# Altium PCB USB-C_BENCH_PSU.PcbDoc
Units mm, origin at the board's own origin, x right, y up, seen from the top; angles counter-clockwise.
Board outline 22 x 17 mm, 2 copper layers (Top Layer, Bottom Layer); 27 components, 15 nets, 71 pads, 34 vias.
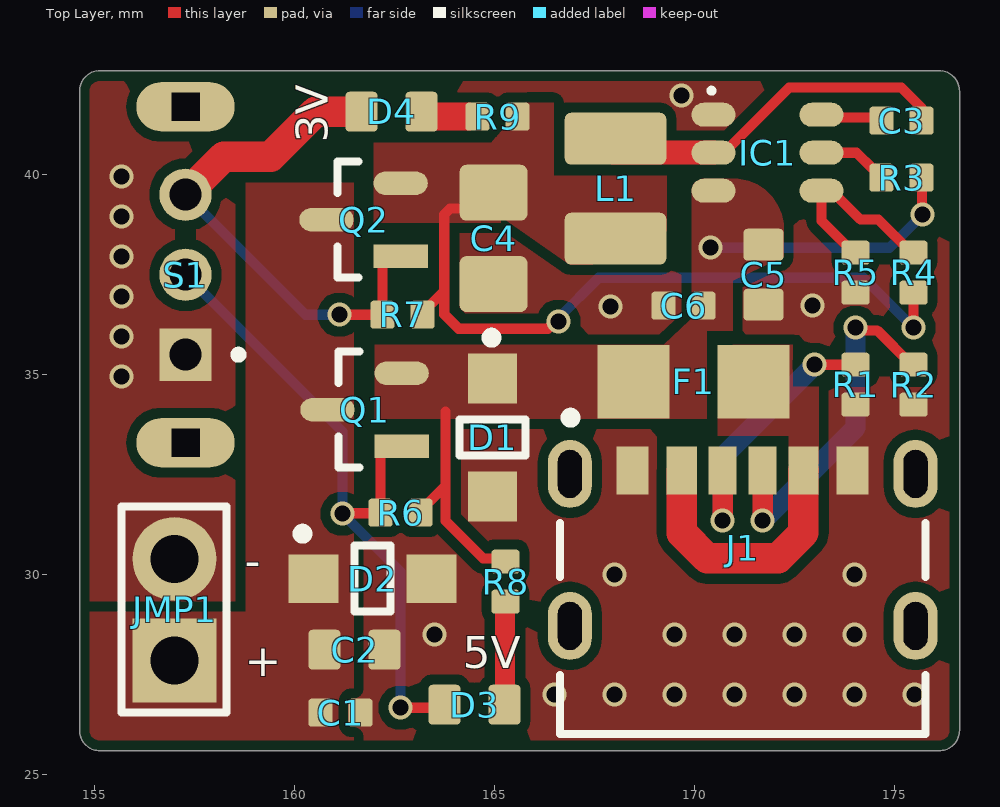
[diagram p0: Top Layer view]
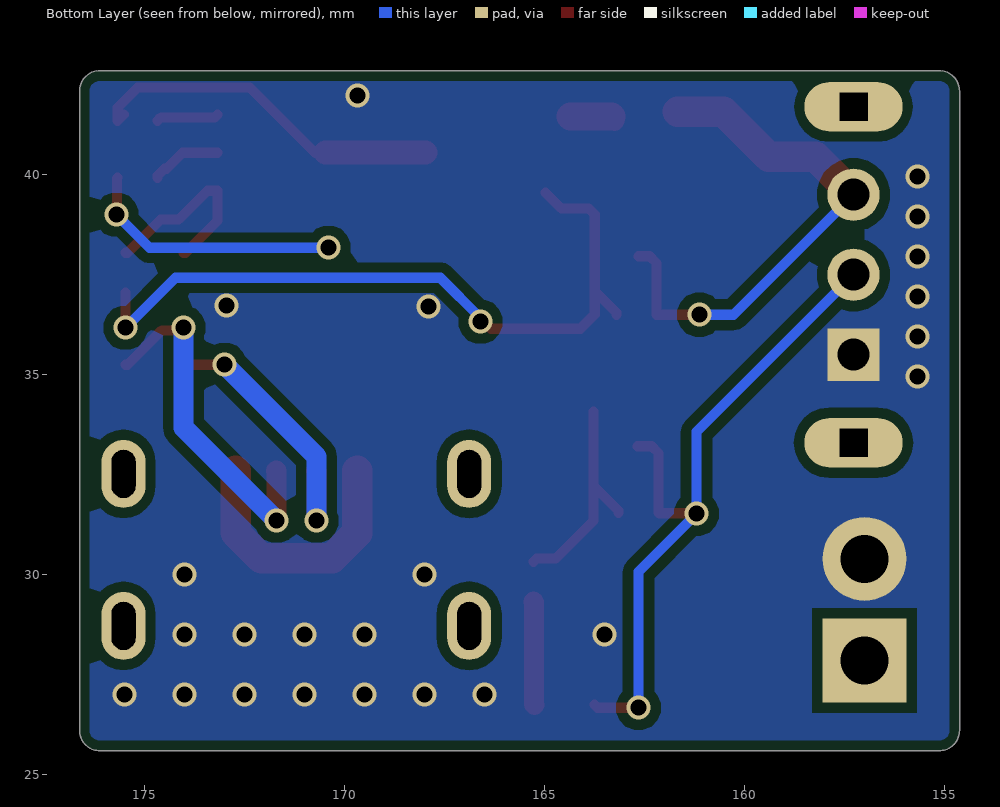
[diagram p1: Bottom Layer view, seen from below]
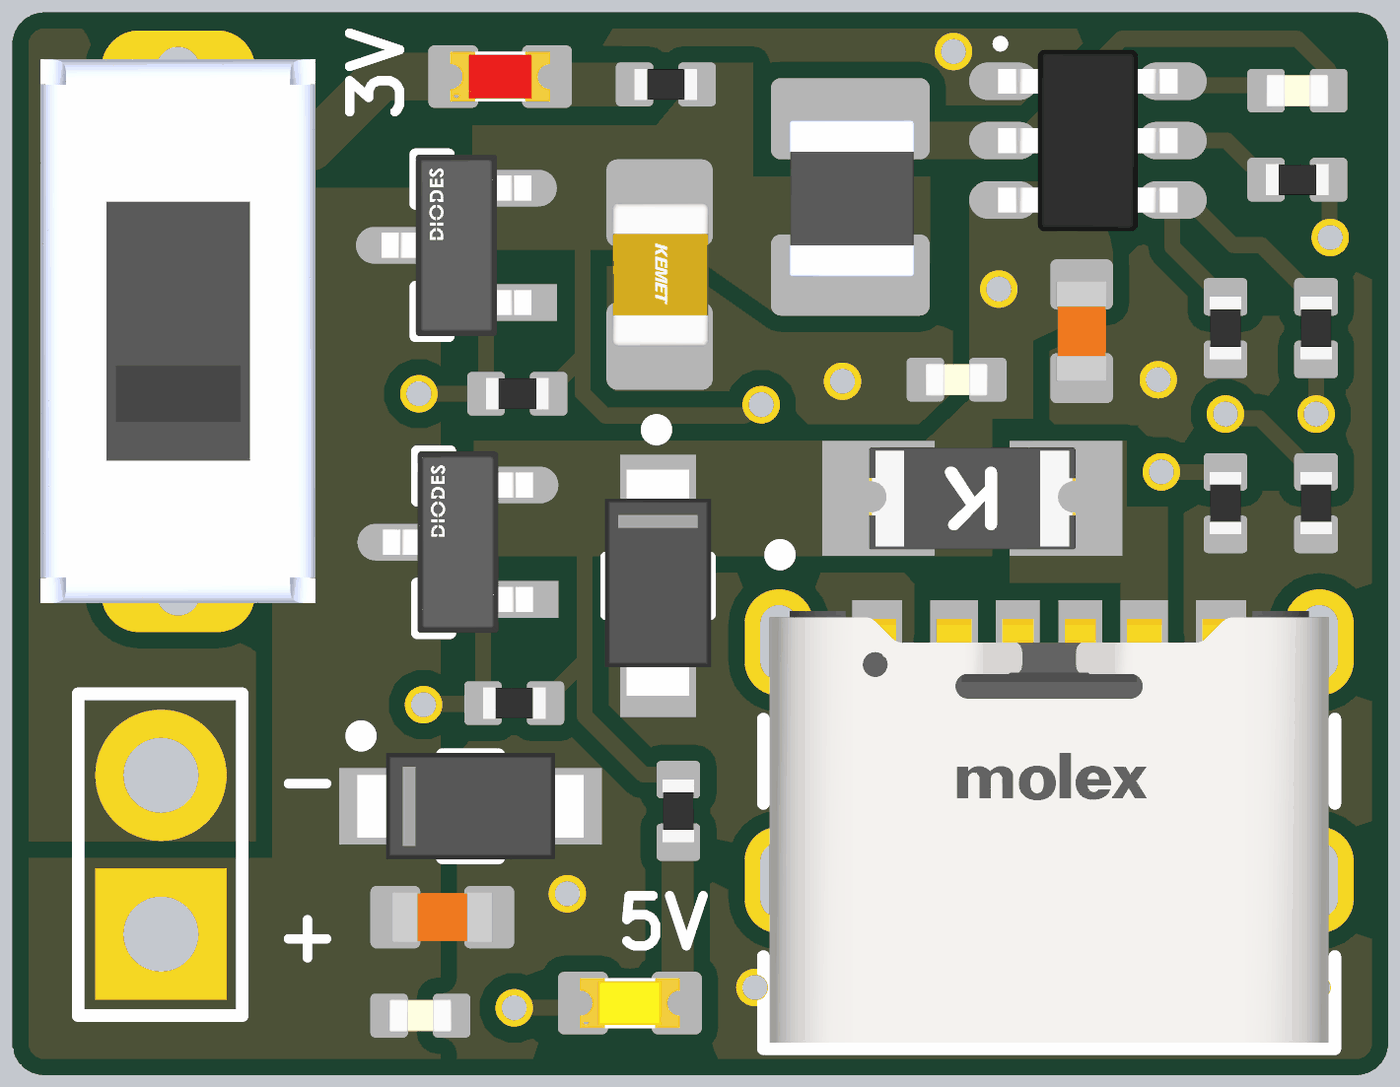
[diagram p2: 3D render of the assembled board from above, using the file's embedded part models]

## Layer stack, top to bottom
Top Solder: solder mask 0.0102, Solder Resist, Dk 3.5
Top Layer: signal copper 0.0356
Dielectric 1: dielectric 0.32, FR-4, Dk 4.8
Bottom Layer: signal copper 0.0356
Bottom Solder: solder mask 0.0102, Solder Resist, Dk 3.5

## Board outline
154.625,26.108 154.625,42.092 cw(c155.133,42.092) 155.133,42.6 176.117,42.6 cw(c176.117,42.092) 176.625,42.092 176.625,26.108 cw(c176.117,26.108) 176.117,25.6 155.133,25.6 cw(c155.133,26.108)

## Design rules (kind name [scope] priority, off if disabled: settings)
BoardOutlineClearance [All] p1: gap=0.254 ignorepadtopadclearanceinfootprint=FALSE except(0: Arc-SplitContinuation Track-SplitContinuation SMDPad-SplitContinuation THPad-SplitContinuation Via-SplitContinuation Fill-SplitContinuation Poly-SplitContinuation Region-SplitContinuation Text-SplitContinuation)
Clearance [All] p1: gap=0.254 ignorepadtopadclearanceinfootprint=FALSE
MinimumSolderMaskSliver [All] p1: minsoldermaskwidth=0.1
PolygonConnect [All] p1: connectstyle=Direct reliefconductorwidth=0.254 reliefentries=4 polygonreliefangle="90 Angle" airgapwidth=0.254
RoutingVias [All] p1: holewidth=0.711 width=1.27 viastyle="Through Hole" minholewidth=0.711 minwidth=1.27 maxholewidth=0.711 maxwidth=1.27
SilkToSolderMaskClearance [IsPad] p1: minsilkscreentomaskgap=0.1 clearancetoexposedcopper=TRUE
SolderMaskExpansion [All] p1: expansion=0 istentingtop=FALSE
SupplyNets "Schematic Supply Nets_4" [InNet('+3V3')] p1: voltage=0.000
SupplyNets "Schematic Supply Nets_3" [InNet('+5V')] p2: voltage=0.000
SupplyNets "Schematic Supply Nets_2" [InNet('GND')] p3: voltage=0.000
SupplyNets "Schematic Supply Nets_1" [InNet('+3V3_OUT')] p4: voltage=0.000
Width [All] p1: maxlimit=0.762 minlimit=0.254 preferedwidth=0.508 minimp=50.000000 maximp=50.000000 favimp=50.000000
28 further rules are at their usual default settings.

## Components (designator, comment, footprint, x,y, rotation, side; value= is the part's Value field where it differs from the comment)
C1 "100nF" CAP_0402 161.15,26.55 r0 top
C2 "22uF" CAP_0603 161.5,28.125 r0 top
C3 "100nF" CAP_0402 175.175,41.35 r0 top
C4 "47uF" CAP_0805 164.975,38.407 r270 top
C5 "22uF" CAP_0603 171.725,37.5 r270 top
C6 "100nF" CAP_0402 169.725,36.725 r180 top
D1 "SMF6.0AT1G" ONSC-SOD-123FL-2-498_V 164.95,33.425 r270 top
D2 "SMF5.0AT1G" ONSC-SOD-123FL-2-498_V 161.95,29.9 r0 top
D3 "WHITE" LED_0603_YELLOW 164.5,26.75 r0 top
D4 "RED" LED_0603_RED 162.425,41.575 r0 top
F1 "F1206" FUSE_1206 169.975,34.825 r180 top
IC1 "TI TPS563201DDCR" "TI TPS563201DDCR" 171.825,40.55 r0 top
J1 "217175-0001" FP-217175-0001-MFG 171.205,29.57 r0 top
JMP1 "Jumper" JMP2_TH 157,29.125 r90 top
L1 "3.3uH" IND_1008 168.025,39.65 r90 top
Q1 "AO3401A" FP-SOT23-IPC_B 161.75,34.125 r180 top
Q2 "AO3401A" FP-SOT23-IPC_B 161.725,38.875 r180 top
R1 "5.1k" RES_0402 174.025,34.75 r270 top
R2 "5.1k" RES_0402 175.475,34.75 r270 top
R3 "100k" RES_0402 175.175,39.925 r0 top
R4 "33.2k" RES_0402 175.475,37.55 r270 top
R5 "10k" RES_0402 174.025,37.55 r90 top
R6 "100k" RES_0402 162.65,31.55 r0 top
R7 "100k" RES_0402 162.7,36.5 r0 top
R8 "330R" RES_0402 165.275,29.825 r90 top
R9 "220R" RES_0402 165.075,41.45 r0 top
S1 "SS12D07VG4" SW_SS12D07VG4 157.275,37.5 r90 top

## Footprints (in the part's own frame and the unit in brackets; to place one, negate y for a bottom-side part, rotate by r counter-clockwise, add the part's x,y. Pads: shape width x height; smd on the part's side, far side on the other; paste and mask are expansions set on the pad)
CAP_0402 [mm]
  rrect25% 0.6x0.7 smd: 1(-0.5,0) 2(0.5,0)
  body extent -0.5,-0.26 0.5,0.26, height 0.37
CAP_0603 [mm]
  rrect25% 0.8x1 smd: 1(-0.75,0) 2(0.75,0)
  body extent -0.8,-0.4 0.8,0.4, height 0.51
CAP_0805 [mm]
  rrect25% 1.4x1.7 smd: 1(-1.143,0) 2(1.143,0)
  body extent -1.15,-0.76 1.15,0.79, height 1.01
FP-217175-0001-MFG [mm]
  rrect100% 1.1x1.7 hole 1.2 slot 0.6 at 0 deg paste-2539.97 mask+0: 1(-4.32,2.95) 2(4.32,2.95) 3(-4.32,-0.85) 4(4.32,-0.85)
  rect 0.7x1.2 smd paste+0 mask+0: A5(-0.5,3.03) B5(0.5,3.03)
  rect 0.76x1.2 smd paste+0 mask+0: A9(1.52,3.03) B9(-1.52,3.03)
  rect 0.8x1.2 smd paste+0 mask+0: A12(2.75,3.03) B12(-2.75,3.03)
  silkscreen extent -4.57,-3.55 4.57,4.48, body extent -4.97,-3.65 4.97,3.9, height 0.25
FP-SOT23-IPC_B [mm]
  rect 1.359x0.587 smd paste+0 mask+0: 1(-0.927,0.915)
  rrect100% 1.359x0.587 smd paste+0 mask+0: 2(-0.927,-0.915) 3(0.927,0)
  silkscreen extent 0.13,-1.45 0.65,1.45, body extent -1.86,-1.7 1.86,1.7, height 0.25
FUSE_1206 [mm]
  rect 1.8x1.84 smd: 1(-1.5,0) 2(1.5,0)
  body extent -1.65,-0.82 1.65,0.81, height 0.84
IND_1008 [mm]
  rrect25% 1.3x2.54 smd: 1(-1.25,0) 2(1.25,0)
  body extent -1.27,-1.03 1.23,0.97, height 1.2
JMP2_TH [mm]
  rect 2.1x2.1 hole 1.2: 1(-1.27,0)
  round 2.1 hole 1.2: 2(1.27,0)
  silkscreen extent -2.58,-1.3 2.57,1.33
LED_0603_RED [mm]
  rrect25% 0.8x1 smd: A(0.75,0) K(-0.75,0)
  body extent -0.8,-0.4 0.8,0.4, height 0.6
LED_0603_YELLOW [mm]
  rrect25% 0.8x1 smd: A(0.75,0) K(-0.75,0)
  body extent -0.8,-0.4 0.8,0.4, height 0.6
ONSC-SOD-123FL-2-498_V [mm] "SOD, 2-Leads, Body 2.7x1.65mm"
  rect 1.25x1.22 smd: 1(-1.475,0) 2(1.475,0)
  silkscreen extent -2.62,-0.82 0.45,0.82, body extent -1.86,-0.85 1.76,0.85, height 0.9
RES_0402 [mm]
  rrect25% 0.6x0.7 smd: 1(-0.5,0) 2(0.5,0)
  body extent -0.5,-0.25 0.5,0.25, height 0.3
SW_SS12D07VG4 [mm]
  rect 1.308x1.308 / inner round 1.308 / far side rect 1.308x1.308 hole 0.8: 1(-2,0)
  round 1.308 hole 0.8: 2(0,0) 3(2,0)
  oval 1.23x2.46 hole 0.7 square: S1(-4.2,0) S2(4.2,0)
  silkscreen extent -2.1,-1.43 -1.9,-1.23, body extent -4.35,-2.2 4.35,2.2, height 8.7
"TI TPS563201DDCR" [mm] "SOT23, 6-Leads, Body 2.90x2.80mm, Pitch 0.95mm, IPC Medium Density"
  oval 1.1x0.6 smd: 1(-1.35,0.95) 2(-1.35,0) 3(-1.35,-0.95) 4(1.35,-0.95) 5(1.35,0) 6(1.35,0.95)
  silkscreen extent -1.46,1.49 -1.34,1.61, body extent -1.44,-1.45 1.44,1.45, height 0.95

## Part data
C1 C3 C6: library part CAP_0402, "Capacitor SMD 0402"
C2 C5: library part CAP_0603, "Capacitor SMD 0603"
C4: library part CAP_0805, "Capacitor SMD 0805"
D1: library part CMP-1061-00612-1, "200 W Transient Voltage Suppressor, 2-Pin SOD-123FL, Pb-Free, Tape and Reel", Manufacturer="On Semiconductor", PartNumber=SMF5.0AT1G, ComponentLink1Description="Manufacturer URL", ComponentLink1URL=http://www.onsemi.com/, ComponentLink2Description=Datasheet, ComponentLink2URL=http://www.onsemi.com/pub_link/Collateral/SMF5.0AT1-D.PDF, ComponentLink3Description="Package Specification", ComponentLink3URL=http://www.onsemi.com/pub_link/Collateral/498-01.PDF, DatasheetVersion="Rev. 7", Direction=Unidirectional, IR Max (uA)=400, Mounting Technology="Surface Mount", PackageDescription="2-Pin SOD, Body 1.65 x 2.7 mm", PackageReference=SOD-123FL-2-498, PackageVersion="Rev. D, 05/2013", Packing="Tape and Reel", RoHS=Pb-Free, V(BR) Typ (V)=6.7
D2: library part CMP-1061-00612-1, "200 W Transient Voltage Suppressor, 2-Pin SOD-123FL, Pb-Free, Tape and Reel", Manufacturer="On Semiconductor", ComponentLink1Description="Manufacturer URL", ComponentLink1URL=http://www.onsemi.com/, ComponentLink2Description=Datasheet, ComponentLink2URL=http://www.onsemi.com/pub_link/Collateral/SMF5.0AT1-D.PDF, ComponentLink3Description="Package Specification", ComponentLink3URL=http://www.onsemi.com/pub_link/Collateral/498-01.PDF, DatasheetVersion="Rev. 7", Direction=Unidirectional, IR Max (uA)=400, Mounting Technology="Surface Mount", PackageDescription="2-Pin SOD, Body 1.65 x 2.7 mm", PackageReference=SOD-123FL-2-498, PackageVersion="Rev. D, 05/2013", Packing="Tape and Reel", PartNumber=SMF5.0AT1G, RoHS=Pb-Free, V(BR) Typ (V)=6.7
D3: library part LED_0603_YELLOW, "LED 0603 WHITE SMD"
D4: library part LED_0603_RED, "LED 0603 RED SMD"
F1: library part FUSE_PPTC_1206, "Fuse PPTC SMD 1206"
J1: library part CMP-04767-000026-1, "CONN RCP USB2.0 C 6+18P SMD RA"
JMP1: library part JMP2_TH, "Jumper 2 Pins Through-Hole DO NOT PLACE"
L1: library part IND_1008, "Inductor SMD 1008"
Q1 Q2: library part CMP-12801-000062-2, "MOSFET P-CH 30V SOT23", Case/Package=SOT-23, Continuous Drain Current (ID)=3.8A, Drain to Source Resistance=65mR, Drain to Source Voltage (Vdss)=-30V, Gate to Source Voltage (Vgs)=20V, Input Capacitance=563pF, Max Operating Temperature=150°C, Max Power Dissipation=1.08W, Min Operating Temperature=-55°C, Package Quantity=3000, Threshold Voltage=-2.1V, Contact Plating=Tin, Element Configuration=Single, Fall Time=15ns, Height=1.1mm, Lead Free="Lead Free", Length=3mm, Mount="Surface Mount", Number of Channels=1, Number of Pins=3, Packaging="Tape and Reel", Radiation Hardening=No, Rds On Max=65mR, REACH SVHC="No SVHC", Rise Time=5ns, Turn-Off Delay Time=31ns, Turn-On Delay Time=4.8ns, Weight=0.000282oz, Width=1.4mm
R1 R2 R3 R4 R5 R6 R7 R8 R9: library part RES_0402, "Resistor SMD 0402"
S1: "Switch Slide ON ON SPDT Top Slide 0.3A 30VDC PC Pins Bracket Mount/Through Hole Automotive Bulk", Package=Package, Check_prices=https://www.snapeda.com/parts/SS12D07VG4/Shouhan/view-part/?ref=eda, MF=Shouhan, MP=SS12D07VG4, SnapEDA_Link=https://www.snapeda.com/parts/SS12D07VG4/Shouhan/view-part/?ref=snap

## Via types
v1: diameter 0.6, hole 0.4, Top Layer to Bottom Layer, 34 vias

## Nets (pads, with @x,y where several pads share a name; then routed paths per layer and width w, separated by ;. In a path a pad name is that pad's centre, name@x,y a point inside that pad or via, vN(x,y) a via of type N, cw(c..) or ccw(c..) an arc to the next point about the centre after c; other vN are vias at no path point)
+3V3: C4.1 L1.1 Q2.2 R4.2 R7.2 R9.2 | length 18.6
  Top Layer w0.254: R7.2 163.2,36.55 163.744,37.094 ; C4.1 164.579,39.154 163.893,39.154 163.744,39.005 163.744,37.094 ; v1(166.6,36.325) 166.506,36.325 166.331,36.15 164.103,36.15 163.744,36.509 163.744,37.094 ; v1(175.475,36.175) R4.2
  Bottom Layer w0.254: v1(166.6,36.325) 166.6,36.419 167.606,37.425 174.225,37.425 v1(175.475,36.175)
+3V3_FET: D4.K Q2.1 R7.1 S1.3 | length 13.2
  Top Layer w0.254: v1(161.125,36.5) R7.1 162.2,37.794 162.366,37.96 Q2.1
  Top Layer w0.762: S1.3 158.225,40.45 159.4,40.45 160.525,41.575 D4.K
  Bottom Layer w0.254: S1.3 160.275,36.5 v1(161.125,36.5)
+3V3_OUT: C1.1 C2.1 D2.1 JMP1.1 Q1.3 Q2.3
+5V: C5.1 C6.1 D1.1 F1.2 IC1.3 Q1.2 R3.2 R6.2 R8.2 | length 12.2
  Top Layer w0.254: R6.2 163.15,31.6 163.775,32.225 ; 163.775,34.075 163.775,32.225 ; R8.2 165.193,30.407 164.72,30.407 163.775,31.351 163.775,32.225 ; R3.2 175.687,39.913 175.687,39.013 v1(175.7,39)
  Bottom Layer w0.254: v1(170.4,38.175) 174.875,38.175 v1(175.7,39)
+5V_FET: D3.K Q1.1 R6.1 S1.2 | length 17.2
  Top Layer w0.254: v1(161.2,31.525) 161.213,31.538 162.138,31.538 R6.1 162.15,33.044 162.316,33.21 Q1.1 ; v1(162.65,26.675) 163.675,26.675 D3.K
  Bottom Layer w0.254: S1.2 161.2,33.575 v1(161.2,31.525) 162.65,30.075 v1(162.65,26.675)
GND: C1.2 C2.2 C4.2 C5.2 C6.2 D1.2 D2.2 IC1.1 J1.A12 J1.B12 JMP1.2 R1.2 R2.2 R5.1 S1.1
  other v1: 166.5,27 168,27 169.5,27 171,27 172.5,27 174,27 175.5,27 163.5,28.5 169.5,28.5 171,28.5 172.5,28.5 174,28.5 168,30 174,30 155.675,34.95 155.675,35.95 167.9,36.7 172.95,36.725 155.675,36.95 155.675,37.95 155.675,38.95 155.675,39.95 169.675,41.975
NetC3_1: C3.1 IC1.6 | length 1.6
  Top Layer w0.254: IC1.6 173.241,41.434 174.591,41.434 C3.1
NetC3_2: C3.2 IC1.2 L1.2 | length 9.1
  Top Layer w0.254: IC1.2 170.738,40.55 172.369,42.181 175.169,42.181 175.675,41.675 C3.2 C3.2@175.519,41.506
  Top Layer w0.6: L1.2@167.975,40.55 IC1.2
NetD3_A: D3.A R8.1 | length 2.6
  Top Layer w0.508: D3.A 165.263,26.762 165.263,29.313 R8.1
NetD4_A: D4.A R9.1 | length 1.2
  Top Layer w0.508: D4.A@163.25,41.35 163.25,41.379 D4.A@163.321,41.45
  Top Layer w0.7: D4.A@163.321,41.45 R9.1@164.35,41.45
NetF1_1: F1.1 J1.A9 J1.B9 | length 6.7
  Top Layer w0.762: J1.B9 169.686,32.599 169.686,31.042 170.313,30.415 172.087,30.415 172.724,31.052 172.724,32.599 J1.A9
NetIC1_4: IC1.4 R4.1 R5.2 | length 4.9
  Top Layer w0.254: R5.2 173.975,38.05 173.175,38.85 IC1.4 173.425,39.6 174.147,38.878 174.597,38.878 175.425,38.05 R4.1
NetIC1_5: IC1.5 R3.1 | length 1.8
  Top Layer w0.254: IC1.5 174.05,40.55 174.452,40.148 174.502,40.148 174.675,39.975 R3.1
NetJ1_A5: J1.A5 R1.1 | length 7.1
  Top Layer w0.254: v1(173,35.25) R1.1
  Top Layer w0.508: v1(170.7,31.35) 170.703,31.353 170.703,32.597 J1.A5
  Bottom Layer w0.508: v1(170.7,31.35) 170.7,32.95 v1(173,35.25)
NetJ1_B5: J1.B5 R2.1 | length 8.9
  Top Layer w0.254: v1(174.025,36.175) 174.091,36.109 174.566,36.109 175.425,35.25 R2.1
  Top Layer w0.508: v1(171.7,31.35) 171.702,31.353 171.702,32.597 J1.B5
  Bottom Layer w0.508: v1(171.7,31.35) 174.025,33.675 v1(174.025,36.175)
pads on no net: J1.1 J1.2 J1.3 J1.4 S1.S1 S1.S2

## Polygon pours and split planes (outlines as drawn)
GND on Top Layer "GND_L01_P014" (solid, pour order 14): 154.55,42.8 176.875,42.8 176.925,42.75 176.925,25.3 154.65,25.3 154.475,25.475
+3V3_OUT on Top Layer "+3V3_OUT_L01_P010" (solid, pour order 10): 158.775,39.8 161.475,39.8 161.475,39.575 161.475,39.175 161.475,30.275 161.475,25.8 158.775,25.8
+5V on Top Layer "+5V_L01_P003" (solid, pour order 3): 170.5,36.425 170.95,37.35 172.225,37.95 172.225,38.65 ccw(c170.975,38.65) 170.975,39.9 170.25,39.9 ccw(c170.25,39.575) 169.925,39.575 169.925,36.975 170.233,36.716
+3V3 on Top Layer "+3V3_L01_P009" (solid, pour order 9): 161.975,38.8 165.15,38.8 165.15,40.8 161.975,40.8
+5V on Top Layer "+5V_L01_P002" (solid, pour order 2): 170.3,33.9 170.3,36.1 170.95,36.1 170.95,37.377 169.225,35.75 162,35.75 162,33.9
NetF1_1 on Top Layer "NETF1_1_L01_P000" (solid, pour order 0): 172.35,32.775 173.1,32.775 173.1,33.175 173.1,34.696 172.45,34.696 172.45,35.75 170.95,35.75 170.575,33.925 170.575,33.475 172.35,33.475
+3V3_OUT on Top Layer "+3V3_OUT_L01_P012" (solid, pour order 12): 154.725,29.075 159.85,29.075 159.975,28.95 159.975,25.475 154.825,25.475 154.675,25.325
+3V3 on Top Layer "+3V3_L01_P008" (solid, pour order 8): 166.475,41.8 165.752,41.8 164.425,40.2 164.9,39.95 166.475,39.921
+3V3 on Top Layer "+3V3_L01_P007" (solid, pour order 7): 165.625,40.25 165.225,38.9 166.81,37.793 ccw(c166.928,37.928) 166.905,37.75 167.45,37.75 167.45,37.834 169.3,38.585 169.3,39.975 166.45,39.975
GND on Bottom Layer "GND_L02_P013" (solid, pour order 13): 154.375,42.65 176.825,42.65 176.825,25.3 154.3,25.3 154.275,25.325

## Silkscreen, mask and mechanical layers (free items; w line width, h text height)
Top Overlay:
  text "3V" at 160.825,40.8 h0.8 r90
  text "-" at 158.75,29.95 h0.8
  text "5V" at 164.2,27.661 h0.8
  text "+" at 158.75,27.467 h0.8
Mechanical 1:
  the board outline again, w0.254

## Text inside footprints (layer, text, board x,y; h text height)
D3: Mechanical 13 "+" at 165.817,27.358 h0.5
D4: Mechanical 13 "+" at 163.742,42.183 h0.5